# Altium PCB Lora_feather.PcbDoc (part 2 of 2)
Units mm, origin at the board's own origin, x right, y up, seen from the top; angles counter-clockwise.
Board outline 96.47 x 23.21 mm, 2 copper layers (Top Layer, Bottom Layer); 61 components, 62 nets, 278 pads, 260 vias.
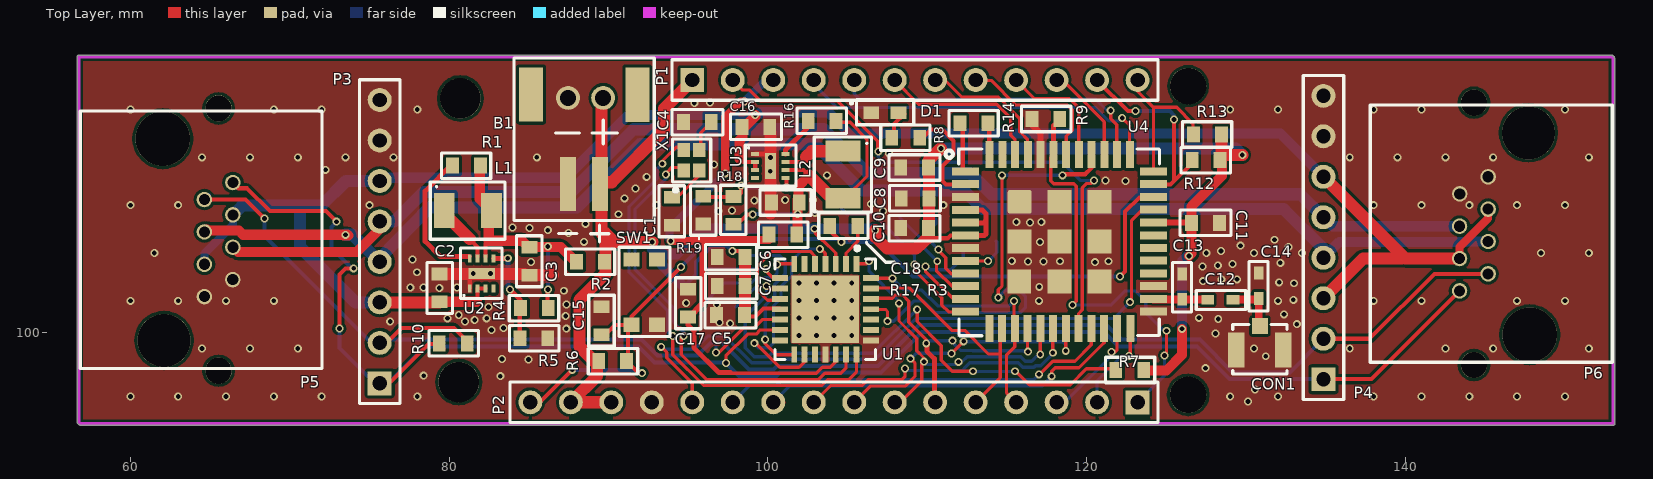
[diagram p0: Top Layer view]

## Via types
v1: diameter 0.5, hole 0.3, Top Layer to Bottom Layer, tented both sides, 242 vias
v2: diameter 0.5, hole 0.3, Top Layer to Bottom Layer, 18 vias

## Nets (pads, with @x,y where several pads share a name; then routed paths per layer and width w, separated by ;. In a path a pad name is that pad's centre, name@x,y a point inside that pad or via, vN(x,y) a via of type N, cw(c..) or ccw(c..) an arc to the next point about the centre after c; other vN are vias at no path point) (continued)
CANL: (continued)
  Bottom Layer w0.254: P5.2 P5.2@64.92,108.63 ; v1(68.42,107.16) 68.42,106.07 75.13,99.36 P3.2 75.84,99.56 92.051,99.56 93.055,98.555 95.589,98.555 96.413,99.38 96.78,99.38 97.13,99.38 98.808,97.702 100.349,97.702 100.569,97.922 106.907,97.922 109.471,100.485 111.979,100.485 111.98,100.484 121.252,100.484 122.175,99.56 127.101,99.56 129.149,97.512 132.742,97.512 P4.2
EN: P1.2 U4.20 | length 35.7
  Top Layer w0.203: P1.2@97.79,115.824 98.385,115.229 98.819,115.229 99.509,114.54 104.354,114.54 106.88,112.014 v1@106.88,111.32 ; U4.20@119.482,100.246 119.482,101.192 119.72,101.43 119.72,109.08 120.003,109.363 120.283,109.363 v1(120.46,109.54)
  Bottom Layer w0.203: v1(106.92,111.36) 106.92,110.971 107.201,110.69 118.47,110.69 119.62,109.54 v1(120.46,109.54)
GND: B1.2 C1.1 C2.2 C3.2 C4.1 C5.2 C6.1 C7.1 C8.2 C9.2 C10.1 C11.1 C13.1 C14.1 C15.2 C16.2 C17.2 C18.1 CON1.2 D1.1 P2.13 P3.7 P3.8 P4.7 P4.8 P5.7 P5.8 P6.7 P6.8 R5.1 R9.2 R19.1 SW1.1 U1.18 U1.22 U1.29 U2.1 U2.9 U3.1 U3.9 U4.3 U4.7 U4.25 U4.27 U4.44 U4.49 U4.50 U4.51 U4.52 U4.53 U4.54 U4.55 U4.56 U4.57 | length 16.4
  Top Layer w0.254: U2.9@81.22,103.683 81.29,103.613 U2.1
  Top Layer w0.305: U3.1 U3.9@100.153,111.21 ; U3.9@100.15,110.73 U3.9@100.15,110.872
  Top Layer w0.381: R9.2@116.552,113.38 116.552,113.04 117.09,112.502 U4.44@117.09,111.15
  Top Layer w0.762: C2.2 81.22,103.683 C3.2@84.733,103.683 ; C3.2@84.97,103.627 86.513,103.627 ; 100.153,107.487 100.153,111.21 C16.2@100.153,112.55
  other v1: 130.12,95.69 60,96 63,96 66,96 69,96 72,96 78,96 129,96 132,96 138,96 141,96 144,96 147,96 150,96 130.55,96.43 83.21,97.27 78.4,97.3 127.45,97.77 84.97,98.32 83.32,98.34 131.23,98.52 64.5,99 67.5,99 70.5,99 130.5,99 136.5,99 142.5,99 145.5,99 151.5,99 128.07,99.94 82.66,100.16 87.35,100.25 83.41,100.29 133.18,100.53 97.63,100.57 96.95,100.63 76.3,100.7 81,100.7 81.6,100.8 128.25,100.86 79.9,100.9 82.35,100.9 127.05,100.93 87.31,101.05 80.6,101.1 132.37,101.15 82.46,101.61 96.79,101.76 87.36,101.77 94.87,101.86 60,102 63,102 66,102 69,102 117,102 132,102 138,102 141,102 147,102 150,102 132.96,102.06 87.19,102.63 79.38,102.81 77.56,102.84 78.39,102.84 80.49,102.84 117.02,102.88 133,103.1 132.07,103.16 127.29,103.23 128.44,103.35 129.43,103.35 81.507,103.71 82.599,103.71 77.98,103.79 127.26,104.16 128.22,104.22 129.15,104.31 132.14,104.38 120.52,104.42 85.14,104.44 116.31,104.46 117.29,104.46 118.32,104.48 121.37,104.48 115.3,104.49 77.7,104.59 61.5,105 127.5,105 130.5,105 133.5,105 148.5,105 151.5,105 128.43,105.12 132.66,105.38 129.65,105.46 88.46,105.7 117.06,105.68 131.77,105.83 87.49,106.25 86.19,106.43 85.03,106.56 83.98,106.59 88.55,106.83 116.43,106.92 115.58,106.94 117.15,106.94 90.62,107.43 102.94,107.52 96.91,107.62 107.22,107.64 97.75,107.67 60,108 63,108 75,108 93,108 111,108 138,108 141,108 144,108 147,108 150,108 99.14,108.29 101.08,108.32 102.82,108.32 90.99,108.43 91.69,109.05 122.43,109.52 121.17,109.54 92.39,109.78 100.147,110.13 72.24,110.22 96.61,110.55 64.5,111 67.5,111 70.5,111 73.5,111 76.5,111 85.5,111 100.15,110.993 136.5,111 139.5,111 142.5,111 145.5,111 151.5,111 107.6,111.24 60,114 69,114 72,114 78,114 129,114 132,114 138,114 141,114 150,114 95.38,114.41 96.37,114.44
  other v2: 101.95,99.82 103.05,99.82 104.15,99.82 105.25,99.82 101.95,100.92 103.05,100.92 104.15,100.92 105.25,100.92 101.95,102.02 103.05,102.02 104.15,102.02 105.25,102.02 101.95,103.12 103.05,103.12 104.15,103.12 105.25,103.12 106.46,108.08 103.71,109.87
MCU_nRST: C15.1 P2.16 R3.1 R6.1 SW1.4 U4.34 | length 55.7
  Top Layer w0.254: P2.16 85.681,95.631 v1(87.72,97.67) ; C15.1 89.807,99.877 90.418,100.488 SW1.4@91.23,100.488 ; v1(92.1,97.46) 91.879,97.46 91.309,98.03 91.019,98.03 91.23,98.241 SW1.4@91.23,100.488 ; v1(94.54,104.12) 91.43,101.01 SW1.4 91.312,100.488 91.23,100.57 SW1.4@91.23,100.488 ; R3.1@103.771,106.52 v1(104.6,105.691) ; v1(122.09,103.53) 122.404,103.844 122.404,107.594 123.3,108.49 U4.34@124.18,108.49
  Bottom Layer w0.254: v1(87.72,97.67) 91.89,97.67 v1(92.1,97.46) ; v1(94.54,104.12) 94.55,104.12 96.305,105.875 104.417,105.875 v1(104.6,105.691) 106.939,105.691 109.1,103.53 v1(122.09,103.53)
MISO: P2.4 U1.28 U4.15 | length 16.9
  Top Layer w0.203: U1.28 106.5,103.37 106.54,103.41 v1(107.81,103.41) ; v1(115.44,101.98) 115.44,100.287 115.482,100.245 115.482,99.114 114.96,98.592 114.96,96.241 P2.4
  Bottom Layer w0.203: v1(107.81,103.41) 108.55,102.67 109.65,102.67 110.64,101.68 115.14,101.68 v1(115.44,101.98) ; P2.4@115.45,95.751 P2.4
MOSI: P2.5 U1.27 U4.14 | length 15.2
  Top Layer w0.203: U1.27 106.49,102.81 108.85,102.81 111.52,100.14 112.348,100.14 113.828,98.66 114.579,98.66 ; P2.5 114.579,97.18 114.579,100.142 U4.14@114.682,100.245
NetC1_2: C1.2 X1.2 | length 2.6
  Top Layer w0.203: C1.2@94.18,108.513 94.304,108.637 94.453,108.637 95.775,109.96 X1.2@95.775,110.365
NetC3_1: C3.1 L1.2 R1.2 R2.1 R4.2 U2.6 | length 16.2
  Top Layer w0.254: U2.6@82.29,104.78 82.29,105.58 82.48,105.77 ; R4.2@86.178,101.54 86.178,102.678 v1(86.2,102.7)
  Top Layer w0.635: R1.2@81.918,110.56 81.918,108.392 L1.2 82.48,107.49 82.48,105.77 84.573,105.77 84.97,105.373 87.008,105.373 R2.1@87.971,104.41
  Bottom Layer w0.254: v1(86.19,105.4) 86.2,105.39 v1(86.2,102.7)
NetC4_2: C4.2 X1.4 | length 1.8
  Top Layer w0.203: X1.4@95.775,111.64 95.775,112.542 C4.2
NetC12_2: C12.2 C14.2 CON1.1 | length 3.2
  Top Layer w0.5: C12.2 130.79,102.07 CON1.1@130.79,100.483
NetC18_2: C18.2 L2.2 R16.2 R17.1 R18.2 U3.6 | length 19.3
  Top Layer w0.203: R16.2@104.198,113.2 105.155,113.2 106.209,112.146 106.209,109.799 L2.2@104.83,108.42
  Top Layer w0.254: R18.2@98.07,106.772 98.718,107.42 v1(99.04,107.42) ; U3.6 102.22,110.21 102.5,109.93
  Top Layer w0.635: R17.1@101.819,106.1 101.863,106.144 v1(101.863,107.44) 101.863,108.35 101.905,108.392 101.905,109.195 102.57,109.86
  Top Layer w0.762: 102.57,109.86 104.01,108.42 L2.2@104.83,108.42
  Bottom Layer w0.254: v1(99.04,107.42) 99.06,107.44 v1(101.863,107.44)
NetD1_2: D1.2 R8.1 | length 1.8
  Top Layer w0.254: R8.1@107.911,112.17 107.911,113.091 D1.2@108.55,113.73
NetL1_1: L1.1 U2.7 | length 3.7
  Top Layer w0.254: 81.29,105.88 81.79,105.38 U2.7@81.79,104.78
  Top Layer w0.762: L1.1 79.69,107.48 81.29,105.88
NetL2_1: L2.1 U3.7 | length 4
  Top Layer w0.254: U3.7 102.07,110.71 102.39,111.03
  Top Layer w0.762: 102.39,111.03 102.74,111.38 L2.1@104.83,111.38
NetR1_1: R1.1 U2.8 | length 8.7
  Top Layer w0.305: R1.1@80.171,110.56 78.49,108.879 78.49,105.73 79.44,104.78 U2.8@81.28,104.78
NetR3_2: R3.2 U1.2 | length 2.5
  Top Layer w0.203: U1.2 104.9,105 105.628,105.728 R3.2@105.628,106.56
NetR4_1: R4.1 R5.2 U2.5 | length 6.2
  Top Layer w0.305: U2.5 83.67,104.66 v1(83.68,104.67) ; v1(83.82,102.7) 84.431,102.089 R4.1@84.431,101.54 ; R5.2@84.422,99.53 R4.1@84.422,101.361
  Bottom Layer w0.305: v1(83.68,104.67) 83.68,102.84 v1(83.82,102.7)
NetR7_2: R7.2 T9.1 U1.9 | length 35.9
  Top Layer w0.203: v1(99.9,102.93) 99.92,102.93 100.09,102.76 U1.9@100.75,102.76 ; v1(109.36,101.45) 109.36,100.7 110.871,99.189 110.871,98.269 111.56,97.58 v1@112.85,97.58 ; v1(115.49,97.58) 115.55,97.58 116.4,96.73 118.979,96.73 119.979,97.73 R7.2@121.822,97.73
  Bottom Layer w0.203: T9.1 99.29,102.93 v1(99.9,102.93) 99.9,102.33 98.58,101.01 98.58,99.044 99.134,98.489 100.023,98.489 100.243,98.709 106.581,98.709 109.322,101.45 v1(109.36,101.45) ; v1(112.87,97.58) 112.89,97.56 115.47,97.56 v1(115.49,97.58)
NetR8_2: R8.2 U4.2 | length 6.9
  Top Layer w0.254: R8.2@109.658,112.17 110.238,112.75 110.94,112.75 111.65,112.04 111.65,111.16 110.94,110.45 110.94,109.52 111.16,109.3 U4.2@112.38,109.3
NetR14_2: R14.2 U4.48 | length 1.9
  Top Layer w0.305: U4.48@113.88,111.15 R14.2@113.88,113.072
NetR16_1: R16.1 U3.8 | length 2.5
  Top Layer w0.305: U3.8 101.1,111.48 102.451,112.831 R16.1@102.451,113.2
NetR18_1: R18.1 R19.2 U3.5 | length 6.4
  Top Layer w0.254: R19.2@96.13,108.558 96.169,108.519 98.07,108.519 98.31,108.759 v1(98.31,109.24) ; U3.5 101.16,109.65 v1(101.16,109.12)
  Bottom Layer w0.254: v1(98.31,109.24) 98.31,109.27 98.38,109.34 98.6,109.12 v1(101.16,109.12)
NetT1_1: T1.1 U4.8 | length 2.9
  Top Layer w0.203: U4.8@112.38,104.49 v1(113.81,104.49)
  Bottom Layer w0.203: v1(113.81,104.49) 114.35,105.03 114.35,105.7 T1.1@114.31,105.74
NetT2_1: T2.1 U4.9 | length 5
  Top Layer w0.203: v1(110.7,105.21) 110.639,105.21 111.149,104.699 111.149,104.041 111.5,103.69 U4.9@112.38,103.69
  Bottom Layer w0.203: T2.1@110.53,107.12 110.53,106.82 110.27,106.56 110.27,105.64 v1(110.7,105.21)
NetT3_1: T3.1 U4.10 | length 6.6
  Top Layer w0.203: v1(110.62,104.48) 110.57,104.43 110.57,103.88 111.55,102.9 U4.10@112.38,102.9
  Bottom Layer w0.203: T3.1 109.78,105.72 109.78,105.32 v1(110.62,104.48)
NetT4_1: T4.1 U4.11 | length 7
  Top Layer w0.203: v1(109.88,104.15) 109.88,103.86 111.65,102.09 U4.11@112.38,102.09
  Bottom Layer w0.203: v1(109.88,104.15) 109.88,104.248 110.178,103.951 111.454,103.951 112.25,104.746 T4.1@112.25,105.3
NetT5_1: T5.1 U4.12 | length 11.5
  Top Layer w0.203: v1(109.2,104.28) 109.2,103.9 110.909,102.191 110.909,101.731 111.34,101.3 U4.12@112.38,101.3
  Bottom Layer w0.203: T5.1 104.94,107.46 106.6,107.46 109.2,104.86 v1(109.2,104.28)
NetT6_1: T6.1 U1.7 | length 8
  Top Layer w0.203: v1(100.56,104.28) 100.6,104.32 U1.7
  Bottom Layer w0.203: T6.1 95.8,101.67 97.24,103.11 98.931,103.11 99.281,103.459 100.309,103.459 100.56,103.71 v1(100.56,104.28)
NetT7_1: T7.1 U1.15 | length 10.2
  Top Layer w0.203: v1(99.822,99.576) 99.822,99.391 99.81,99.379 99.829,99.359 99.829,99.301 100.51,98.62 U1.15
  Bottom Layer w0.203: T7.1@98.88,104.84 100.749,104.84 101.089,104.499 101.089,103.701 100.429,103.041 100.429,102.321 99.822,101.713 v1(99.822,99.576)
NetT8_1: T8.1 U1.8 | length 4.9
  Top Layer w0.203: v1(99.89,103.99) 99.89,103.85 100.32,103.42 U1.8
  Bottom Layer w0.203: T8.1@96.14,104.02 96.52,104.02 96.55,103.99 v1(99.89,103.99)
NetU1_4: U1.4 U1.16 | length 14.7
  Top Layer w0.203: v1(99.14,99.34) 99.24,99.34 100.749,97.831 101.951,97.831 102.3,98.18 U1.16@102.3,98.61 ; v1(103.25,105.25) 103.32,105.25 103.6,104.97 U1.4@103.6,104.31
  Bottom Layer w0.203: v1(99.14,99.34) 99.14,99.3 99.393,99.047 100.041,99.047 100.352,99.357 100.352,101.704 100.81,102.163 100.81,102.883 101.47,103.543 101.47,104.49 102.23,105.25 v1(103.25,105.25) v1@103.18,105.25
NetU1_5: U1.5 U1.10 | length 7.9
  Top Layer w0.203: U1.10@100.75,102.04 99.97,102.04 99.35,102.66 99.35,104.199 100.251,105.1 102.651,105.1 102.95,104.801 U1.5@102.95,104.24
NetU1_20: U1.20 X1.1 | length 27.1
  Top Layer w0.203: v1(93.591,109.921) 93.591,109.942 93.7,110.051 93.68,110.071 93.974,110.365 X1.1@94.8,110.365 ; v1(94.71,99.8) 94.559,99.649 94.559,98.631 96.121,97.069 103.194,97.069 103.575,97.45 104.558,97.45 104.9,97.791 U1.20
  Bottom Layer w0.203: v1(93.591,109.921) 93.591,109.662 91.655,107.726 91.655,103.974 94.071,101.558 94.071,100.667 94.71,100.028 v1(94.71,99.8) v1@94.792,99.8
NetU1_21: U1.21 X1.3 | length 29.8
  Top Layer w0.203: v1(93.37,110.598) 93.37,110.77 94.24,111.64 X1.3@94.8,111.64 ; v1(94.03,99.79) 94.03,98.62 95.962,96.688 103.388,96.688 103.769,97.069 105.089,97.069 105.55,97.53 U1.21
  Bottom Layer w0.203: v1(93.37,110.598) 93.062,110.29 93.062,109.672 91.274,107.884 91.274,103.816 93.69,101.4 93.69,100.06 93.81,99.94 93.88,99.94 v1(94.03,99.79)
NSS: P2.7 U1.1 U4.17 | length 21.6
  Top Layer w0.203: U1.1 106.18,104.32 v1(106.34,104.48) ; P2.7 108.291,95.631 109.64,96.98 109.64,98.03 v1(109.79,98.18) 109.79,98.409 109.33,98.869 109.33,99.621 108.22,100.731 v1(108.22,101.84) ; v1(117.082,98.632) U4.17@117.082,100.245
  Bottom Layer w0.203: v1(106.34,104.48) 106.34,103.84 108.22,101.96 v1(108.22,101.84) ; v1(109.79,98.18) 109.97,98 111.81,98 111.96,98.15 v1(111.96,98.17) 112.172,98.17 112.493,98.49 115.867,98.49 116.144,98.213 116.535,98.213 116.955,98.632 v1(117.082,98.632)
PA0: P2.12 U4.33 | length 43.4
  Top Layer w0.203: v1(93.3,99.11) 93.649,98.761 93.649,98.421 95.25,96.82 P2.12 ; v1(122.71,101.91) 122.81,101.81 122.81,107.04 123.47,107.7 U4.33@124.18,107.7
  Bottom Layer w0.203: v1(93.3,99.11) 93.448,98.962 95.392,98.962 96.216,99.786 97.298,99.786 98.977,98.108 100.18,98.108 100.4,98.328 106.739,98.328 109.303,100.892 112.147,100.892 112.149,100.89 121.69,100.89 v1(122.71,101.91)
PA4: P2.10 U4.22 | length 24
  Top Layer w0.203: v1(117.8,97.26) 117.8,97.592 118.012,97.805 119.515,97.805 121.082,99.372
  Top Layer w0.254: P2.10 P2.10@100.971,95.631 ; 121.082,99.372 U4.22@121.082,100.245
  Bottom Layer w0.203: P2.10 101.368,96.669 117.209,96.669 v1(117.8,97.26)
PA5: P2.11 U4.21 | length 25
  Top Layer w0.203: v1(117,97.39) 117.059,97.39 117.879,98.211 119.263,98.211 120.282,99.23 U4.21@120.282,100.246
  Bottom Layer w0.203: P2.11 98.849,96.69 100.522,96.69 100.883,97.05 116.66,97.05 v1(117,97.39)
PA9: P2.8 U4.19 | length 18
  Top Layer w0.203: P2.8@105.41,95.84 P2.8 106.439,96.66 108.63,96.66 109.22,97.25 109.22,98.1 v1(108.95,98.37) ; v1(111.52,98.7) v1(112.28,99.46) ; v1(118.682,98.86) U4.19@118.682,100.245
  Bottom Layer w0.203: v1(108.95,98.37) 109.289,98.709 111.389,98.709 111.45,98.77 v1(111.52,98.7) ; v1(112.28,99.46) 112.41,99.46 112.46,99.41 112.48,99.43 118.49,99.43 118.682,99.238 v1(118.682,98.86)
PA10: P2.9 U4.18 | length 18.5
  Top Layer w0.203: P2.9 103.927,96.688 105.928,96.688 106.282,97.041 108.401,97.041 108.59,97.23 v1(108.59,97.75) ; v1(117.87,98.74) 117.87,100.233 U4.18@117.882,100.245
  Bottom Layer w0.203: v1(108.59,97.75) 108.721,97.619 112.178,97.619 112.34,97.782 112.34,97.799 112.65,98.109 115.709,98.109 115.987,97.832 116.693,97.832 116.781,97.919 117.118,97.919 117.87,98.671 v1(117.87,98.74)
PA12: R14.1 U4.1 | length 3.3
  Top Layer w0.305: R14.1@112.011,113.25 112.22,113.041 112.22,110.26 U4.1@112.38,110.1
PB2: P1.4 U4.37 | length 23.1
  Top Layer w0.203: v1(122.22,113.46) 122.68,113 122.68,111.16 U4.37@122.69,111.15
  Bottom Layer w0.203: P1.4@102.87,115.824 102.87,115.58 104.32,114.13 120.541,114.13 121.391,113.28 122.04,113.28 v1(122.22,113.46)
PB5: U1.25 U4.40 | length 28.6
  Top Layer w0.203: U1.25@106.45,101.46 107.37,101.46 107.5,101.33 v1(107.5,100.72) ; v1(114.45,102.21) 114.45,102.7 ; 114.46,102.7 114.681,102.921 v1(114.681,109.871)
  Top Layer w0.254: v1(118.48,109.87) 118.48,109.94 119.905,109.94 120.29,110.325 U4.40@120.29,111.15
  Bottom Layer w0.203: v1(107.5,100.72) 107.881,100.72 109.141,101.979 109.771,101.979 110.477,101.273 112.305,101.273 112.307,101.271 115.851,101.271 116.15,101.57 116.15,102.28 115.77,102.66 114.89,102.66 114.45,102.22 v1(114.45,102.21) ; v1(114.681,109.871) 118.278,109.871 118.38,109.77 v1(118.48,109.87)
PB6: P1.10 U4.39 | length 6.1
  Top Layer w0.203: P1.10@118.11,115.824 118.486,115.824 121.09,113.22 U4.39@121.09,111.15
PB7: P1.5 U4.38 | length 20.3
  Top Layer w0.203: v1(121.5,113.94) 121.5,113.431 121.88,113.051 U4.38@121.88,111.15
  Bottom Layer w0.203: P1.5@105.41,115.824 105.41,114.98 105.75,114.64 120.57,114.64 121.27,113.94 v1(121.5,113.94)
PH0: P1.6 U4.46 | length 10.7
  Top Layer w0.203: P1.6@107.95,115.824 109.444,114.33 114.34,114.33 115.23,113.44 115.23,112.388 115.49,112.128 U4.46@115.49,111.15
PH1: P1.7 U4.45 | length 8.8
  Top Layer w0.203: P1.7@110.49,115.824 111.106,115.824 112.14,114.79 114.43,114.79 115.797,113.423 115.797,112.59 115.81,112.59 116.29,112.11 U4.45@116.29,111.15
RX: P2.3 U4.23 | length 6.6
  Top Layer w0.203: v1(121.55,98.79) 121.78,98.79 121.889,98.899 U4.23@121.889,100.245
  Bottom Layer w0.203: P2.3 118.621,95.631 121.55,98.56 v1(121.55,98.79)
SCK: P2.6 U1.26 U4.16 | length 18.1
  Top Layer w0.203: U1.26 106.489,102.159 107.791,102.159 108.001,102.369 108.439,102.369 108.831,101.978 108.831,100.659 109.93,99.56 v1(109.93,99.33) ; v1(111.57,99.499) 111.559,99.51 v1@111.573,99.51 ; U4.16@116.282,100.245 116.282,98.742 116.31,98.77 v1(116.31,98.81)
  Top Layer w0.305: v1(109.93,99.33) 109.97,99.29 109.97,98.84 110.44,98.37 110.44,95.681 P2.6
  Bottom Layer w0.203: v1(109.93,99.33) 110.041,99.441 110.041,99.499 v1(111.57,99.499) 111.57,99.401 112.091,98.88 112.829,98.88 112.838,98.871 116.025,98.871 116.086,98.81 v1(116.31,98.81)
SCL: P1.11 R12.1 U4.35 | length 12.9
  Top Layer w0.254: P1.11@120.65,115.824 122.574,113.9 v1(123.05,113.9) ; U4.35@124.18,109.3 125.261,109.3 125.486,109.524 ; v1(125.476,113.38) 125.476,109.534 125.486,109.524 ; R12.1@126.621,110.66 125.486,109.524
  Bottom Layer w0.254: v1(123.05,113.9) 125.21,113.9 125.476,113.634 v1(125.476,113.38)
SDA: P1.12 R13.1 U4.36 | length 9.6
  Top Layer w0.203: P1.12@123.19,115.824 123.19,115.13 124.18,114.14 ; U4.36@124.18,110.1 124.18,114.14 ; R13.1@126.661,112.54 126.661,113.119 125.64,114.14 124.18,114.14
Solar1: P3.4 P4.4 P5.4 P6.4 | length 89.1
  Top Layer w0.635: P5.4 P5.4@64.8,106.48 ; P5.4@64.87,106.41 66.81,106.41 67.08,106.14 73.627,106.14 73.677,106.09 v1@73.38,106.09
  Bottom Layer w0.254: P3.4@75.638,104.668 P3.4 ; P4.4@134.67,104.7 P4.4@134.67,104.99
  Bottom Layer w0.635: P4.4 135.85,105.7 143.796,105.7 143.816,105.72 P6.4
  Bottom Layer w0.762: v1(73.49,106.14) 73.94,106.14 P3.4 ; P3.4@75.638,104.668 78.772,107.85 88,107.85 91.97,111.82 102.97,111.82 105.86,108.93 112.29,108.93 113.471,107.749 132.361,107.749 134.85,105.26 P4.4
Solar2: P3.5 P4.5 P5.5 P6.5 | length 83.1
  Top Layer w0.305: P5.5 P5.5@66.74,105.05 ; P3.5@75.64,106.51 P3.5
  Top Layer w0.635: P5.5@66.74,105.05 74.18,105.05 P3.5@75.64,106.51
  Bottom Layer w0.305: P4.5 135.41,106.68
  Bottom Layer w0.635: 135.41,106.68 P6.5
  Bottom Layer w0.762: P3.5 76.548,106.98 78.398,108.83 87.651,108.83 91.581,112.76 103.499,112.76 106.259,110 112.71,110 114.021,108.689 133.401,108.689 P4.5
SWCLK: P1.8 U4.42 | length 9.8
  Top Layer w0.203: P1.8@113.03,115.824 114.006,115.824 115.55,114.28 118.781,114.28 119.109,113.952 119.109,112.729 118.72,112.34 118.72,111.18 U4.42@118.69,111.15
SWDIO: P1.9 U4.41 | length 7.6
  Top Layer w0.203: P1.9@115.57,115.824 116.704,114.69 118.91,114.69 119.49,114.11 U4.41@119.49,111.15
TX: P2.2 U4.24 | length 5.8
  Top Layer w0.203: v1(122.65,98.53) 122.73,98.61 U4.24@122.73,100.245
  Bottom Layer w0.203: P2.2 120.65,97 122.18,98.53 v1(122.65,98.53)
pads on no net: B1. P5. P6. SW1.2 SW1.3 U1.6 U1.14 U1.17 U1.23 U1.24 U2.4 U3.4 U4.13 U4.28 U4.29 U4.30 U4.31 U4.47

## Polygon pours and split planes (outlines as drawn)
GND on Top Layer "Top Layer-GND" (solid, remove dead copper, pour order 2): 155.14,95.291 155.14,116.291 155.115,116.514 155.041,116.725 154.922,116.914 154.763,117.073 154.574,117.192 154.363,117.266 154.14,117.291 54.14,117.291 53.917,117.266 53.706,117.192 53.517,117.073 53.358,116.914 53.239,116.725 53.165,116.514 53.165,95.068 53.239,94.857 53.358,94.667 53.517,94.509 53.706,94.39 53.917,94.316 54.14,94.291 154.14,94.291 154.363,94.316 154.574,94.39 154.763,94.509 154.922,94.667 155.041,94.857 155.115,95.068
GND on Bottom Layer "Bottom Lay- GND" (solid, remove dead copper, pour order 5): 56.689,94.319 cw(c56.76,94.39) 56.66,94.39 56.66,117.31 cw(c56.76,117.31) 56.76,117.41 152.94,117.41 cw(c152.94,117.31) 153.011,117.381 153.081,117.311 cw(c153.01,117.24) 153.11,117.24 153.11,94.36 cw(c153.03,94.3) 153.13,94.3 cw(c153.03,94.3) 153.03,94.2 56.85,94.2 cw(c56.85,94.3) 56.779,94.229

## Keep-outs
Keep-Out Layer:
  lines w0.2: 56.76,94.39 56.76,117.31 152.94,117.31 153.01,117.24 153.01,94.32 153.03,94.3 56.85,94.3 56.76,94.39

## Silkscreen, mask and mechanical layers (free items; w line width, h text height)
Top Overlay:
  lines w0.1: 95.67,105.84 95.67,106.09
  lines w0.2: 106.18,105.67 106.18,105.62 106.51,105.29 107.38,104.42 107.92,104.42
Bottom Overlay:
  text "GND" at 138.52,114.52 h0.7
  text "SDA" at 123.73,114.49 h0.7 r90
  text "SWCLK" at 113.39,114.4 h0.7 r90
  text "SCL" at 121.01,114.4 h0.7 r90
  text "PH1" at 110.81,114.38 h0.7 r90
  text "SWDIO" at 115.98,114.38 h0.7 r90
  text "PB6" at 118.56,114.37 h0.7 r90
  text "+5V" at 100.56,114.36 h0.7 r90
  text "PH0" at 108.25,114.33 h0.7 r90
  text "PB2" at 103.24,114.31 h0.7 r90
  text "PB7" at 105.89,114.31 h0.7 r90
  text "VBAT" at 95.33,114.28 h0.7 r90
  text "EN" at 98.11,114.22 h0.7 r90
  text "GND" at 73.68,114.2 h0.7
  text "GND" at 138.6,111.95 h0.7
  text "GND" at 73.57,111.84 h0.7
  text "+12V" at 73.85,109.42 h0.7
  text "+12V" at 139.22,109.43 h0.7
  text "Solar2" at 140.61,107.07 h0.7
  text "Solar2" at 73.7,106.84 h0.7
  text "IRNAS.eu" at 133.28,105.64 h2
  text "Solar1" at 140.27,104.37 h0.7
  text "Solar1" at 73.62,104.25 h0.7
  text "MCU_nRST" at 85.32,102.77 h0.7 r90
  text "lora_feather" at 133.28,102.31 h2
  text "+12V" at 73.71,101.71 h0.7
  text "+12V" at 139.1,101.66 h0.7
  text "BOOT0" at 123.47,100.73 h0.7 r90
  text "+VREF" at 90.54,100.13 h0.7 r90
  text "+3V3" at 87.9,99.76 h0.7 r90
  text "MISO" at 115.77,99.41 h0.7 r90
  text "v0.2" at 133.34,99.41 h2
  text "GND" at 92.97,99.38 h0.7 r90
  text "MOSI" at 113.4,99.4 h0.7 r90
  text "TX" at 120.85,99.38 h0.7 r90
  text "PA5" at 98.23,99.36 h0.7 r90
  text "PA4" at 100.75,99.37 h0.7 r90
  text "PA10" at 103.16,99.36 h0.7 r90
  text "PA9" at 105.67,99.36 h0.7 r90
  text "NSS" at 108.27,99.37 h0.7 r90
  text "SCK" at 110.61,99.37 h0.7 r90
  text "PA0" at 95.59,99.34 h0.7 r90
  text "RX" at 118.46,99.32 h0.7 r90
  text "CANL" at 139.08,99.3 h0.7
  text "CANL" at 73.44,99.1 h0.7
  text "CANH" at 139.22,96.7 h0.7
  text "CANH" at 73.49,96.65 h0.7
Mechanical 1:
  lines w0.254: 56.597,93.309 56.598,92.801 ; 58.12,93.567 56.598,93.055 ; 58.123,92.551 56.598,93.055 ; 96.908,93.155 56.598,93.055 ; 112.702,93.195 153.012,93.295 ; 151.486,93.799 153.012,93.295 ; 151.489,92.783 153.012,93.295 ; 153.011,93.549 153.012,93.041
  text "96.414 (mm)" at 97.164,92.242 h1.52 r0.14
Assembly TOP:
  text "Assembly TOP" at 92.36,119.6 h2

## Dimensions
56.76,117.41 to 56.85,94.2 on Mechanical 1